# Altium PCB QS30-1_NIXIE_TUBE_UNO_SHIELD.PcbDoc
Units mil, origin at the board's own origin, x right, y up, seen from the top; angles counter-clockwise.
Board outline 2050 x 2750 mil, 2 copper layers (Top Layer, Bottom Layer); 17 components, 52 nets, 116 pads, 1 vias.
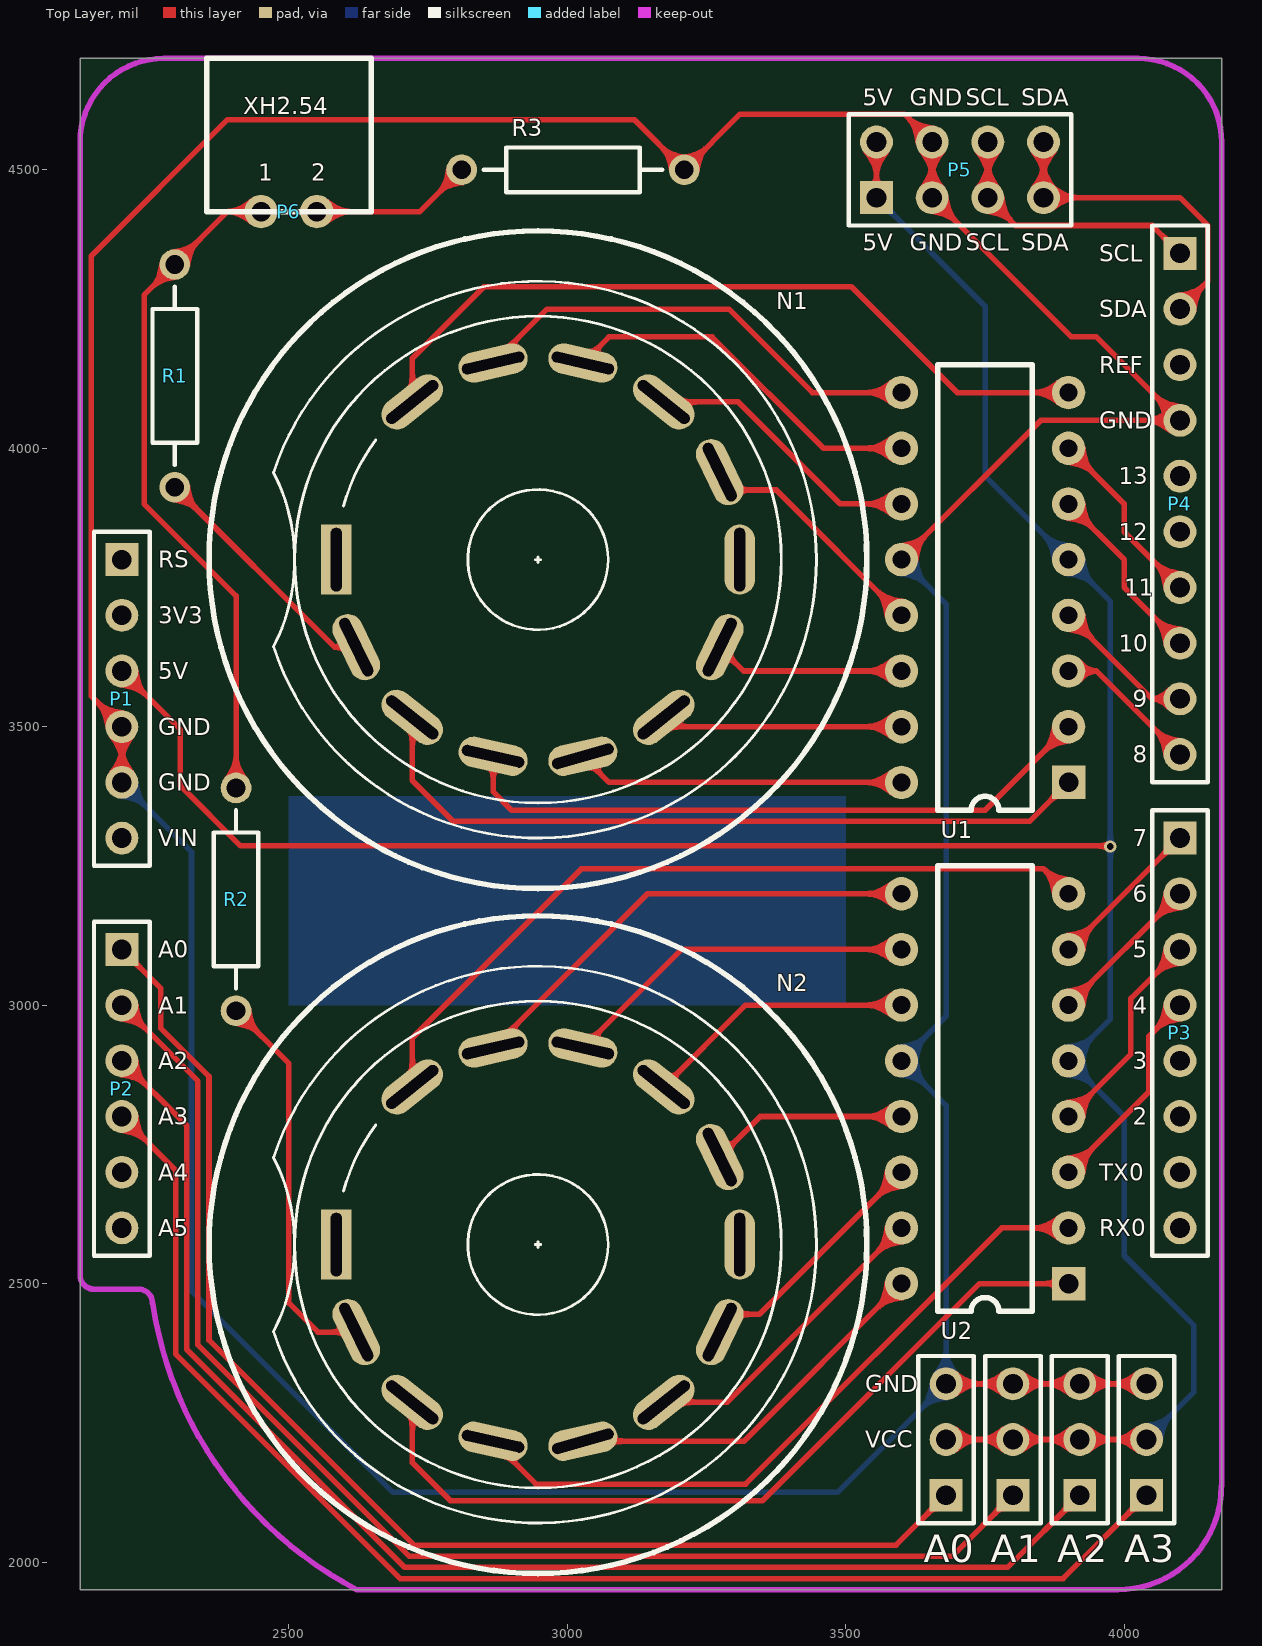
[diagram p0: Top Layer view]
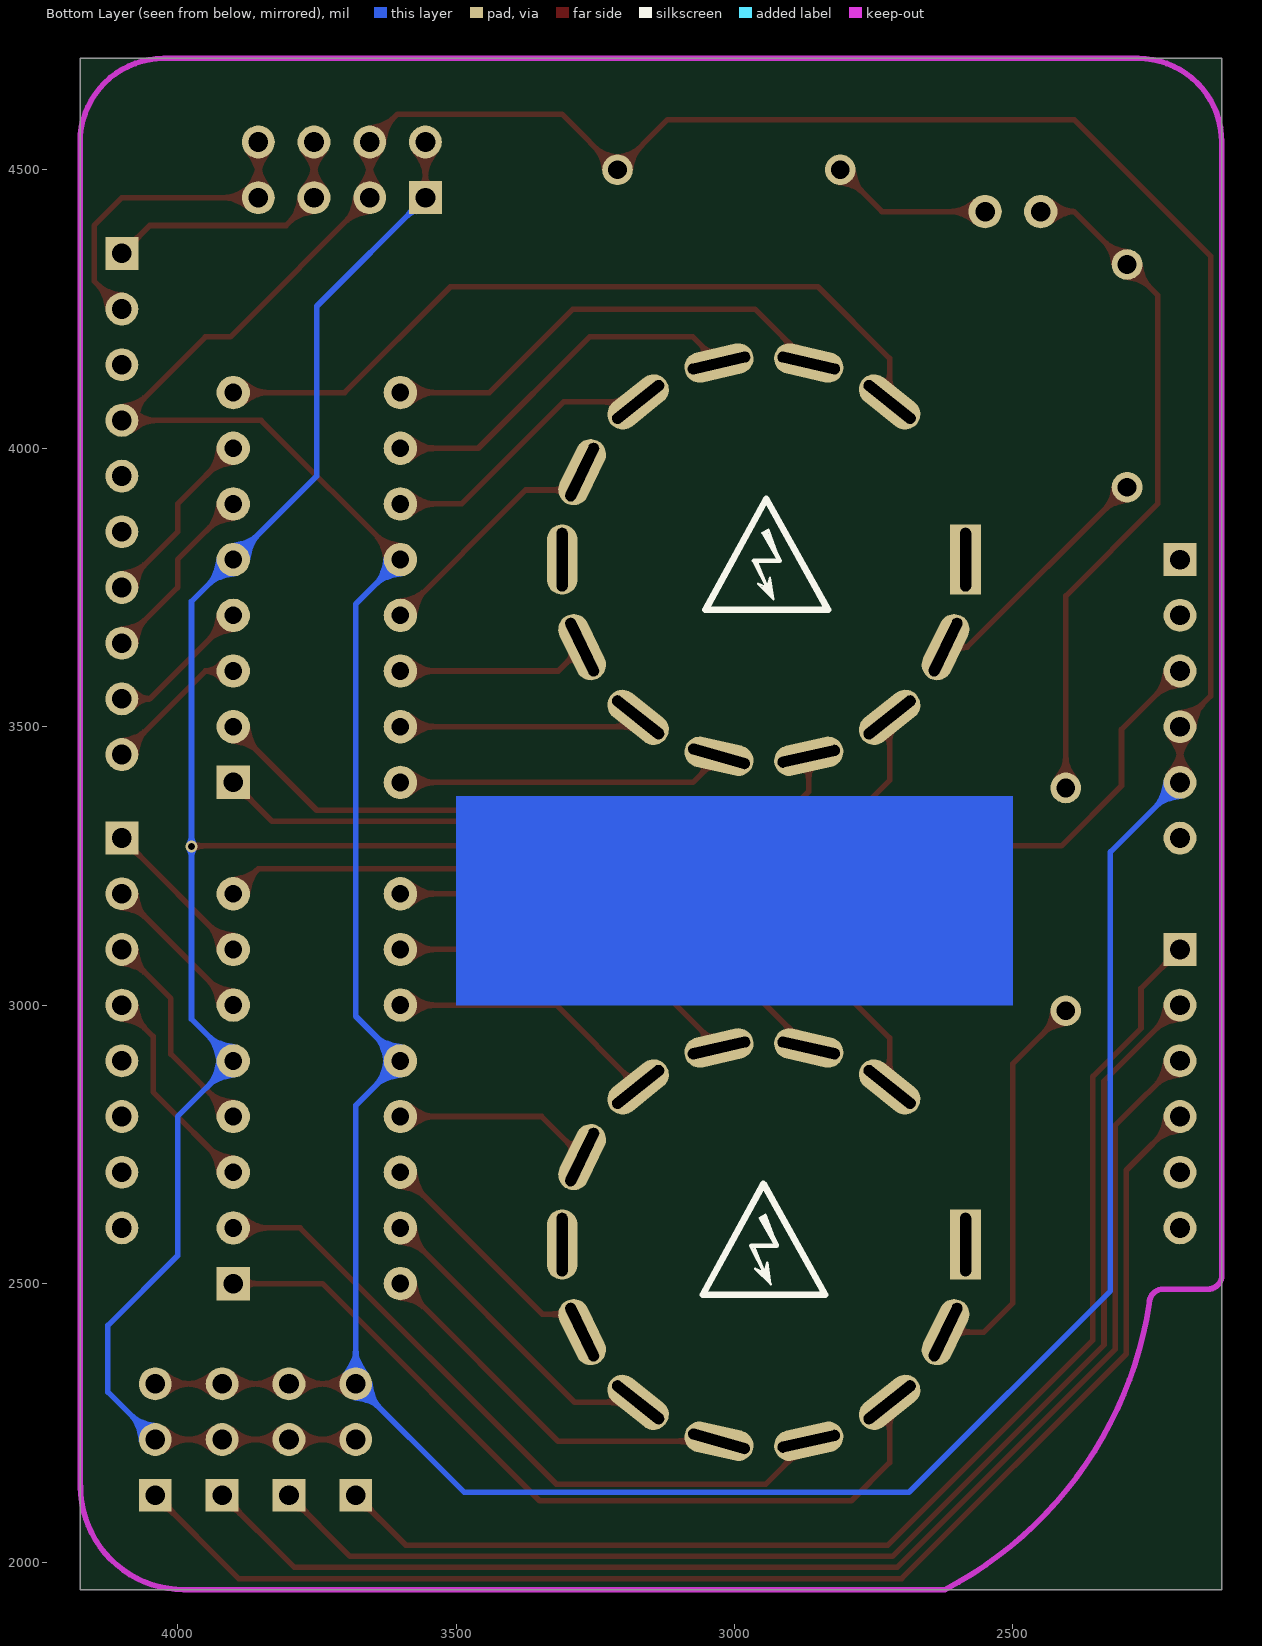
[diagram p1: Bottom Layer view, seen from below]

## Layer stack, top to bottom
Top Solder: solder mask 0.4, Solder Resist, Dk 3.5
Top Layer: signal copper 1.4
Dielectric 1: dielectric 12.6, FR-4, Dk 4.8
Bottom Layer: signal copper 1.4
Bottom Solder: solder mask 0.4, Solder Resist, Dk 3.5

## Board outline
2125,4700 4175,4700 4175,1950 2125,1950

## Design rules (kind name [scope] priority, off if disabled: settings)
Clearance [All] p1: gap=10 ignorepadtopadclearanceinfootprint=FALSE except(0: Arc-Hole Track-Hole SMDPad-Hole THPad-Hole Via-Hole Fill-Hole Poly-Hole Region-Hole Text-Hole)
Height [All] p1: minheight=0 maxheight=2000 prefheight=500
HoleSize [All] p1: absolutevalues=TRUE maxlimit=200 minlimit=1 maxpercent=80.000 minpercent=20.000
PolygonConnect [All] p1: connectstyle=Relief reliefconductorwidth=10 reliefentries=4 polygonreliefangle="90 Angle" airgapwidth=10
RoutingVias [All] p1: holewidth=12 width=22 viastyle="Through Hole" minholewidth=12 minwidth=22 maxholewidth=28 maxwidth=50
SilkToSilkClearance [All] p1: silktosilkclearance=5
SolderMaskExpansion [All] p1: expansion=4
Width [All] p1: maxlimit=10 minlimit=10 preferedwidth=10
27 further rules are at their usual default settings.

## Classes and differential pairs
component class QS30-1_NIXIE_TUBE_UNO_SHIELD: A0 A1 A2 A3 N1 N2 P1 P2 P3 P4 P5 P6 R1 R2 R3 U2

## Components (designator, comment, footprint, x,y, rotation, side; value= is the part's Value field where it differs from the comment)
A0 "Header 3" HDR1X3 3680,2120 r90 top (schematic designator P7)
A1 "Header 3" HDR1X3 3800,2120 r90 top (schematic designator P8)
A2 "Header 3" HDR1X3 3920,2120 r90 top (schematic designator P9)
A3 "Header 3" HDR1X3 4040,2120 r90 top (schematic designator P10)
N1 "QS30-1" QS30-1 2947.2,3800 r270 top
N2 "QS30-1" QS30-1 2947.2,2570 r270 top
P1 "Header 6" HDR1X6 2200,3800 r270 top
P2 "Header 6" HDR1X6 2200,3100 r270 top
P3 "Header 8" HDR1X8 4100,3300 r270 top
P4 "Header 10" HDR1X10 4100,4350 r270 top
P5 "Header 4X2A" HDR2X4_CEN 3555,4450 r0 top
P6 "Header 2" XH2.54_2P_THROUGH_HOLE_PIN_HEADER 2500,4425 r0 top
R1 "20k" AXIAL-0.4 2295,4130 r270 top value=1K
R2 "20k" AXIAL-0.4 2405,3190 r270 top value=1K
R3 "0R" AXIAL-0.4 3010,4500 r0 top value=1K
U1 "K155ID1" DIP16 3900,3400 r180 top
U2 "K155ID1" DIP16 3900,2500 r180 top

## Footprints (in the part's own frame and the unit in brackets; to place one, negate y for a bottom-side part, rotate by r counter-clockwise, add the part's x,y. Pads: shape width x height; smd on the part's side, far side on the other; paste and mask are expansions set on the pad)
AXIAL-0.4 [mm] "Axial Device, Thru-Hole; 2 Leads; 0.4 in Pin Spacing"
  round 1.4 hole 0.85: 1(-5.08,0) 2(5.08,0)
  silkscreen extent -4.06,-1.02 4.06,1.02
DIP16 [mil]
  rect 60x60 hole 35: 1(0,0)
  round 60 hole 32: 2(0,-100) 3(0,-200) 4(0,-300) 5(0,-400) 6(0,-500) 7(0,-600) 8(0,-700) 9(300,-700) 10(300,-600) 11(300,-500) 12(300,-400) 13(300,-300) 14(300,-200) 15(300,-100) 16(300,0)
  silkscreen extent 65,-750 235,50
HDR1X3 [mm] "Connector; Header; 3 Position"
  rect 1.5x1.5 hole 0.9: 1(0,0)
  round 1.5 hole 0.9: 2(2.54,0) 3(5.08,0)
  silkscreen extent -1.27,-1.27 6.35,1.27
HDR1X6 [mm] "Connector; Header; 6 Position"
  rect 1.5x1.5 hole 0.9: 1(0,0)
  round 1.5 hole 0.9: 2(2.54,0) 3(5.08,0) 4(7.62,0) 5(10.16,0) 6(12.7,0)
  silkscreen extent -1.27,-1.27 13.97,1.27
HDR1X8 [mm] "Connector; Header; 8 Position"
  rect 1.5x1.5 hole 0.9: 1(0,0)
  round 1.5 hole 0.9: 2(2.54,0) 3(5.08,0) 4(7.62,0) 5(10.16,0) 6(12.7,0) 7(15.24,0) 8(17.78,0)
  silkscreen extent -1.27,-1.27 19.05,1.27
HDR1X10 [mm] "Connector; Header; 10 Position"
  rect 1.5x1.5 hole 0.9: 1(0,0)
  round 1.5 hole 0.9: 2(2.54,0) 3(5.08,0) 4(7.62,0) 5(10.16,0) 6(12.7,0) 7(15.24,0) 8(17.78,0) 9(20.32,0) 10(22.86,0)
  silkscreen extent -1.27,-1.27 24.13,1.27
HDR2X4_CEN [mm] "Connector; Header; 4x2 Position"
  rect 1.5x1.5 hole 0.9: 1(0,0)
  round 1.5 hole 0.9: 2(2.54,0) 3(5.08,0) 4(7.62,0) 5(0,2.54) 6(2.54,2.54) 7(5.08,2.54) 8(7.62,2.54)
  silkscreen extent -1.27,-1.27 8.89,3.81
QS30-1 [mm]
  rect 3.2x1.4 hole 0.5 slot 2.9 at 0 deg: 1(0,-9.2)
  oval 3.2x1.4 hole 0.5 slot 2.9 at 25.71 deg rot 25.71: 2(3.992,-8.289) 9(-3.992,8.289)
  oval 3.2x1.4 hole 0.5 slot 2.9 at 51.43 deg rot 51.43: 3(7.193,-5.736) 10(-7.193,5.736)
  oval 3.2x1.4 hole 0.5 slot 2.9 at 77.14 deg rot 77.14: 4(8.969,-2.047) 11(-8.969,2.047)
  oval 3.2x1.4 hole 0.5 slot 2.9 at 106.06 deg rot 102.86: 5(8.969,2.047)
  oval 3.2x1.4 hole 0.5 slot 2.9 at 128.57 deg rot 128.57: 6(7.193,5.736) 13(-7.193,-5.736)
  oval 3.2x1.4 hole 0.5 slot 2.9 at 154.29 deg rot 154.29: 7(3.992,8.289)
  oval 3.2x1.4 hole 0.5 slot 2.9 at 0 deg: 8(0,9.2)
  oval 3.2x1.4 hole 0.5 slot 2.9 at 102.86 deg rot 102.86: 12(-8.969,-2.047)
  silkscreen extent -15,-15 15,15
XH2.54_2P_THROUGH_HOLE_PIN_HEADER [mil]
  round 60 hole 35: 1(-50,0) 2(50,0)
  silkscreen extent -148,0 148,276

## Part data
A0 A1 A2 A3: "Header, 3-Pin", LatestRevisionDate=17-Jul-2002, LatestRevisionNote="Re-released for DXP Platform.", Publisher="Altium Limited"
P1 P2: "Header, 6-Pin", LatestRevisionDate=17-Jul-2002, LatestRevisionNote="Re-released for DXP Platform.", Publisher="Altium Limited"
P3: "Header, 8-Pin", LatestRevisionDate=17-Jul-2002, LatestRevisionNote="Re-released for DXP Platform.", Publisher="Altium Limited"
P4: "Header, 10-Pin", LatestRevisionDate=17-Jul-2002, LatestRevisionNote="Re-released for DXP Platform.", Publisher="Altium Limited"
P5: "Header, 4-Pin, Dual row", LatestRevisionDate=17-Jul-2002, LatestRevisionNote="Re-released for DXP Platform.", Publisher="Altium Limited"
P6: "Header, 2-Pin", LatestRevisionDate=17-Jul-2002, LatestRevisionNote="Re-released for DXP Platform.", Publisher="Altium Limited"
R1 R2 R3: library part Res2, "Resistor", LatestRevisionDate=17-Jul-2002, LatestRevisionNote="Re-released for DXP Platform.", PackageDescription="Axial Device, Thru-Hole; 2 Leads; 0.4 in Pin Spacing", PackageReference=AXIAL-0.4, Published=8-Jun-2000, Publisher="Altium Limited"
U1 U2: "Nixie tube driver"

## Via types
v1: diameter 22, hole 12, Top Layer to Bottom Layer, 1 vias

## Nets (pads, with @x,y where several pads share a name; then routed paths per layer and width w, separated by ;. In a path a pad name is that pad's centre, name@x,y a point inside that pad or via, vN(x,y) a via of type N, cw(c..) or ccw(c..) an arc to the next point about the centre after c; other vN are vias at no path point)
GND: A0.3 A1.3 A2.3 A3.3 P1.4 P1.5 P4.4 P5.2 P5.6 R3.2 U1.12 U2.12 | length 8482.8
  Top Layer w10: P1.5 P1.4 2145,3555 2145,4345 2390,4590 3120,4590 R3.2 3310,4600 3605,4600 P5.6 P5.2 3905,4200 3950,4200 P4.4 3850,4050 U1.12 ; A0.3 A1.3 A2.3 A3.3
  Bottom Layer w10: P1.5 2325,3275 2325,2487 2687,2125 3485,2125 A0.3 3680,2820 U2.12 3680,2980 3680,3720 U1.12
HV: P6.1 R1.1 R2.1 | length 1225.5
  Top Layer w10: R2.1 2405,3735 2240,3900 2240,4275 R1.1 2390,4425 P6.1
HV_GND: P6.2 R3.1 | length 291.1
  Top Layer w10: P6.2 2735,4425 R3.1
NetN1_2: N1.2 R1.2 | length 444.8
  Top Layer w10: R1.2 2582.15,3642.85 N1.2
NetN1_3: N1.3 U1.1 | length 1351.3
  Top Layer w10: N1.3 2721.37,3403.63 2795,3330 3830,3330 U1.1
NetN1_4: N1.4 U1.2 | length 1172.8
  Top Layer w10: N1.4 2866.61,3383.39 2900,3350 3750,3350 U1.2
NetN1_5: N1.5 U1.16 | length 591.6
  Top Layer w10: N1.5 3074.68,3400 U1.16
NetN1_6: N1.6 U1.15 | length 433.9
  Top Layer w10: N1.6 3189.85,3500 U1.15
NetN1_7: N1.7 U1.14 | length 344.2
  Top Layer w10: N1.7 3316.39,3600 U1.14
NetN1_9: N1.9 U1.13 | length 451.8
  Top Layer w10: N1.9 3273.54,3925 3375,3925 U1.13
NetN1_10: N1.10 U1.11 | length 502.8
  Top Layer w10: N1.10 3306.82,4083.18 3490,3900 U1.11
NetN1_11: N1.11 U1.10 | length 674.5
  Top Layer w10: N1.11 3074.68,4200 3260,4200 3460,4000 U1.10
NetN1_12: N1.12 U1.9 | length 835.7
  Top Layer w10: N1.12 2963.48,4250 3290,4250 3440,4100 U1.9
NetN1_13: N1.13 U1.8 | length 1388.8
  Top Layer w10: N1.13 2721.37,4161.37 2850,4290 3510,4290 3700,4100 U1.8
NetN2_2: N2.2 R2.2 | length 706.8
  Top Layer w10: R2.2 2500,2895 2500,2465 2552.15,2412.85 N2.2
NetN2_3: N2.3 U2.1 | length 1476.8
  Top Layer w10: N2.3 2721.37,2178.63 2790,2110 3350,2110 3740,2500 U2.1
NetN2_4: N2.4 U2.2 | length 1255.8
  Top Layer w10: N2.4 2943.48,2140 3320,2140 3780,2600 U2.2
NetN2_5: N2.5 U2.16 | length 689.5
  Top Layer w10: N2.5 3316.88,2216.88 U2.16
NetN2_6: N2.6 U2.15 | length 556.7
  Top Layer w10: N2.6 3286.82,2286.82 U2.15
NetN2_7: N2.7 U2.14 | length 464.2
  Top Layer w10: N2.7 3273.54,2445 3345,2445 U2.14
NetN2_9: N2.9 U2.13 | length 356.6
  Top Layer w10: N2.9 3346.39,2800 U2.13
NetN2_10: N2.10 U2.11 | length 487.8
  Top Layer w10: N2.10 3319.85,3000 U2.11
NetN2_11: N2.11 U2.10 | length 645.5
  Top Layer w10: N2.11 3204.68,3100 U2.10
NetN2_12: N2.12 U2.9 | length 848.1
  Top Layer w10: N2.12 3143.48,3200 U2.9
NetN2_13: N2.13 U2.8 | length 1411.2
  Top Layer w10: N2.13 2721.37,2941.37 3025,3245 3855,3245 U2.8
NetP1_1: P1.1
NetP1_2: P1.2
NetP1_6: P1.6
NetP2_1: A0.1 P2.1 | length 2279.6
  Top Layer w10: P2.1 2270,3030 2270,2958.28 2356.46,2871.83 2356.46,2398.4 2724.56,2030.29 3590.29,2030.29 A0.1
NetP2_2: A1.1 P2.2 | length 2332.7
  Top Layer w10: P2.2 2336.46,2863.54 2336.46,2390.11 2716.27,2010.29 3690.29,2010.29 A1.1
NetP2_3: A2.1 P2.3 | length 2385.9
  Top Layer w10: P2.3 2316.46,2783.54 2316.46,2381.83 2707.99,1990.29 3790.29,1990.29 A2.1
NetP2_4: A3.1 P2.4 | length 2439
  Top Layer w10: P2.4 2296.46,2703.54 2296.46,2373.54 2699.71,1970.29 3890.29,1970.29 A3.1
NetP2_5: P2.5
NetP2_6: P2.6
NetP3_1: P3.1 U2.7 | length 282.8
  Top Layer w10: U2.7 P3.1
NetP3_2: P3.2 U2.6 | length 282.8
  Top Layer w10: U2.6 P3.2
NetP3_3: P3.3 U2.4 | length 382.8
  Top Layer w10: U2.4 4012,2912 4012,3012 P3.3
NetP3_4: P3.4 U2.3 | length 382.8
  Top Layer w10: U2.3 4044,2844 4044,2944 P3.4
NetP3_5: P3.5
NetP3_6: P3.6
NetP3_7: P3.7
NetP3_8: P3.8
NetP4_1: P4.1 P5.3 P5.7 | length 486.4
  Top Layer w10: P5.7 P5.3 3805,4400 4050,4400 P4.1
NetP4_2: P4.2 P5.4 P5.8 | length 586.4
  Top Layer w10: P5.8 P5.4 4100,4450 4150,4400 4150,4300 P4.2
NetP4_3: P4.3
NetP4_5: P4.5
NetP4_6: P4.6
NetP4_7: P4.7 U1.7 | length 332.8
  Top Layer w10: U1.7 4000,3900 4000,3850 P4.7
NetP4_8: P4.8 U1.6 | length 332.8
  Top Layer w10: U1.6 4000,3800 4000,3750 P4.8
NetP4_9: P4.9 U1.4 | length 262.1
  Top Layer w10: U1.4 4050,3550 P4.9
NetP4_10: P4.10 U1.3 | length 262.1
  Top Layer w10: U1.3 3950,3600 P4.10
VCC: A0.2 A1.2 A2.2 A3.2 P1.3 P5.1 P5.5 U1.5 U2.5 | length 4987.7
  Top Layer w10: P1.3 2305,3495 2305,3394 2413,3286 v1@3975,3286 ; P5.1 P5.5 ; A0.2 A1.2 A2.2 A3.2
  Bottom Layer w10: P5.1 3750,4255 3750,3950 U1.5 3975,3725 v1(3975,3285) 3975,2975 U2.5 4000,2800 4000,2550 4125,2425 4125,2305 A3.2
pads on no net: N1.1 N1.8 N2.1 N2.8

## Keep-outs
Keep-Out Layer:
  lines w10: 2622.46,1950.19 cw(c2947.34,2570.63) 2255,2465 ccw(c2230,2465) 2230,2490 2150,2490 cw(c2150,2515) 2125,2515 2125,4550 cw(c2275,4550) 2275,4700 4025,4700 cw(c4025,4550) 4175,4550 4175,2136.03 ; 2623.15,1950.29 3988.53,1950.29 ccw(c3988.53,2136.03) 4174.27,2136.03

## Other copper
Bottom Layer:
  region: 2500,3375 3500,3375 3500,3000 2500,3000

## Silkscreen, mask and mechanical layers (free items; w line width, h text height)
Top Overlay:
  text "5V" at 3530,4615 h30
  text "GND" at 3615,4615 h30
  text "SCL" at 3715,4615 h30
  text "SDA" at 3815,4615 h30
  text "5V" at 3530,4355 h30
  text "GND" at 3615,4355 h30
  text "SCL" at 3715,4355 h30
  text "SDA" at 3815,4355 h30
  text "SCL" at 3955,4335 h30
  text "SDA" at 3955,4235 h30
  text "REF" at 3955,4135 h30
  text "GND" at 3955,4035 h30
  text "13" at 3990,3935 h30
  text "12" at 3990,3835 h30
  text "RS" at 2265,3785 h30
  text "11" at 4000,3735 h30
  text "3V3" at 2265,3685 h30
  text "10" at 3990,3635 h30
  text "5V" at 2265,3585 h30
  text "9" at 4015,3535 h30
  text "GND" at 2265,3485 h30
  text "8" at 4015,3435 h30
  text "GND" at 2265,3385 h30
  text "VIN" at 2265,3285 h30
  text "7" at 4015,3285 h30
  text "6" at 4015,3185 h30
  text "A0" at 2265,3085 h30
  text "5" at 4015,3085 h30
  text "A1" at 2265,2985 h30
  text "4" at 4015,2985 h30
  text "A2" at 2265,2885 h30
  text "3" at 4015,2885 h30
  text "A3" at 2265,2785 h30
  text "2" at 4015,2785 h30
  text "A4" at 2265,2685 h30
  text "TX0" at 3955,2685 h30
  text "A5" at 2265,2585 h30
  text "RX0" at 3955,2585 h30
  text "GND" at 3535,2305 h30
  text "VCC" at 3535,2205 h30
Bottom Overlay:
  lines w3.94: 2919,3798.98 2939,3853.98 2950,3847.98 2921,3797.98 ; 2924,2568.98 2944,2623.98 2955,2617.98 2926,2567.98 ; 2933,3733.98 2937,3757.98 ; 2935,3737.98 2948,3750.98 ; 2936,3740.98 2937,3744.98 ; 2936,3745.98 2939,3753.98 ; 2938,2503.98 2942,2527.98 ; 2940,2507.98 2953,2520.98 ; 2940,3745.98 2967,3797.98 ; 2941,2510.98 2942,2514.98 ; 2941,2515.98 2944,2523.98 ; 2942,3835.98 2947,3846.98 ; 2945,2515.98 2972,2567.98 ; 2947,2605.98 2952,2616.98 ; 2960,3796.98 2939,3745.98 2965,3797.98 ; 2965,2566.98 2944,2515.98 2970,2567.98 ; 2930,3728.98 2936,3767.98 2941,3749.98 2958,3756.98 2930,3728.98 ; 2935,2498.98 2963,2526.98 2946,2519.98 2941,2537.98 2935,2498.98
  lines w7.87: 2943,3848.98 2919,3797.98 2965,3797.98 ; 2948,2618.98 2924,2567.98 2970,2567.98
  lines w11.81: 2832,3709.98 2943,3908.98 3052,3709.98 2832,3709.98 ; 2837,2479.98 3057,2479.98 2948,2678.98 2837,2479.98
Bottom Solder:
  text "do335's" at 3450,3275 h60
  text "Nixie Shield" at 3450,3150 h80
  text "rev1.0" at 2800,3050 h50

## Text inside footprints (layer, text, board x,y; h text height)
P6: Top Overlay "2" at 2540,4480 h30; Top Overlay "1" at 2445,4480 h30; Top Overlay "XH2.54" at 2418,4600 h30